# Altium PCB Copy of VCO-PCBNIRMAZZ.PcbDoc
Units mm, origin at the board's own origin, x right, y up, seen from the top; angles counter-clockwise.
Board outline 152.4 x 101.6 mm, 2 copper layers (Top Layer, Bottom Layer), stack 1.59 mm thick; 15 components, 11 nets, 37 pads, 4 vias.
Unrouted connection lines stored in the file: 2.
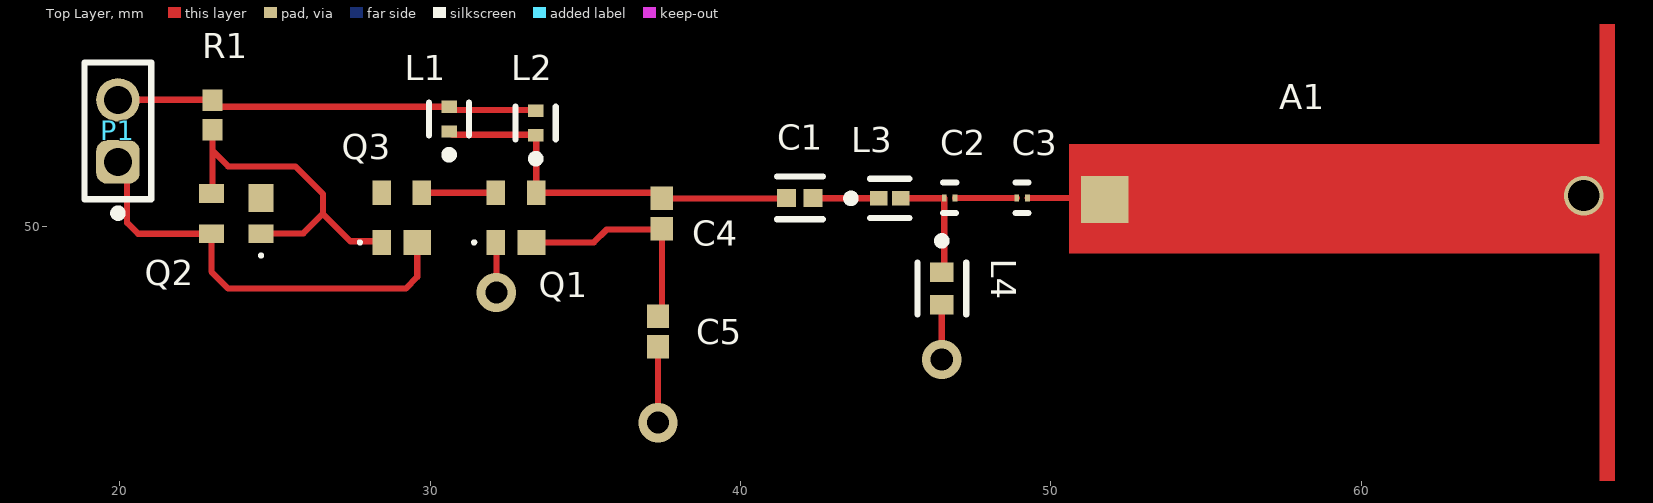
[diagram p0: Top Layer view]
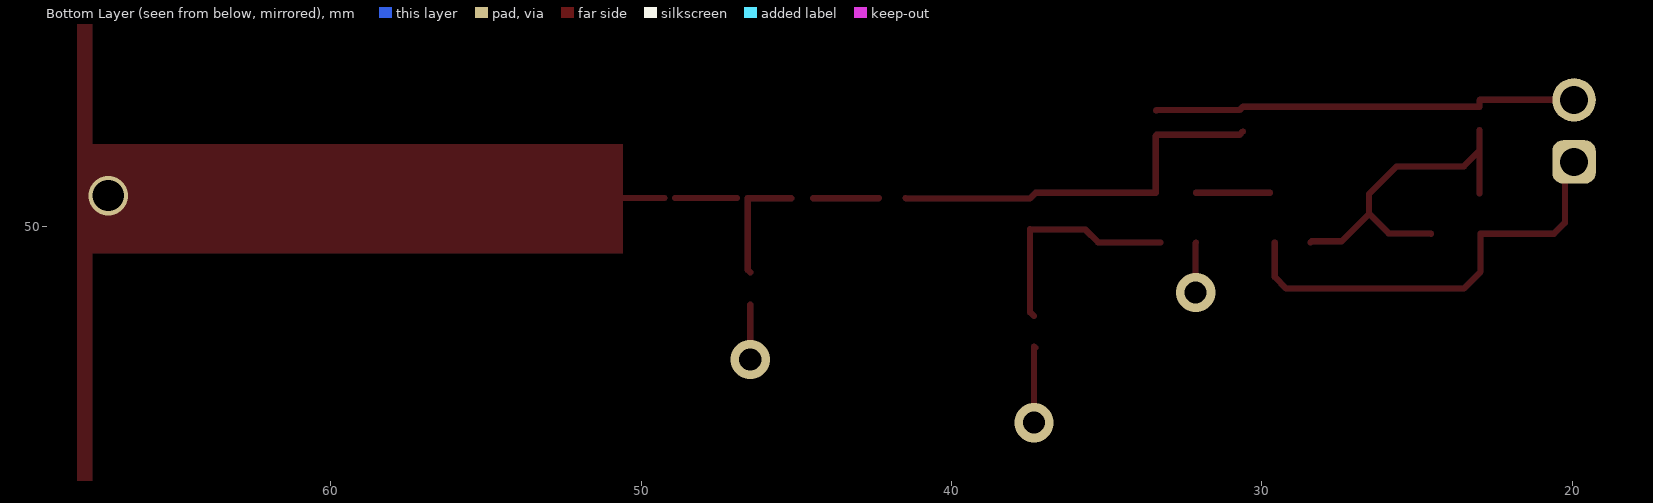
[diagram p1: Bottom Layer view, seen from below]

## Layer stack, top to bottom
Top Solder: solder mask 0.0102, Solder Resist, Dk 3.5
Top Layer: signal copper 0.035
Dielectric 1: dielectric 1.52, RO4350B, Dk 4.8
Bottom Layer: signal copper 0.035
Bottom Solder: solder mask 0.0102, Solder Resist, Dk 3.5

## Board outline
0.762,0.508 153.162,0.508 153.162,102.108 0.762,102.108
cut-out: 13.462,101.854 114.173,101.854 114.554,102.235 114.554,0.762 13.589,0.762 13.462,0.635

## Design rules (kind name [scope] priority, off if disabled: settings)
BoardOutlineClearance [All] p1: gap=0.2 ignorepadtopadclearanceinfootprint=FALSE
Clearance [All] p1: gap=0.127 ignorepadtopadclearanceinfootprint=FALSE except(0.25: Arc-Hole Track-Hole SMDPad-Hole THPad-Hole Via-Hole Fill-Hole Poly-Hole Region-Hole Text-Hole)
ComponentClearance [All] p1: gap=0.127 collisioncheckmode=3 verticalgap=0.127 showdistances=TRUE
DiffPairsRouting [All] p1: maxlimit=0.254 minlimit=0.127 mostfreqgap=0.127 toplayer_minwidth=0.127 toplayer_maxwidth=25.4 toplayer_prefwidth=0.127 bottomlayer_minwidth=0.127 bottomlayer_maxwidth=25.4 bottomlayer_prefwidth=0.127 maxuncoupledlength=12.7
Height [All] p1: minheight=0 maxheight=1816.048 prefheight=12.7
HoleSize [All] p1: absolutevalues=TRUE maxlimit=6.3 minlimit=0.3 maxpercent=80.000 minpercent=20.000
HoleToHoleClearance [All] p1: gap=0.25 allowstackedmicrovias=FALSE
MinimumAnnularRing [All] p1: minimumring=0.076
MinimumSolderMaskSliver [All] p1: minsoldermaskwidth=0
PlaneClearance [All] p1: clearance=0.127
PlaneConnect PlaneConnectPowerPads [InPadClass('PowerPads')] p1: planeconnectstyle=Direct reliefexpansion=0.508 reliefentries=4 reliefconductorwidth=0.254 reliefairgap=0.254
PlaneConnect [All] p2: pad.planeconnectstyle=Relief pad.reliefexpansion=0.3 pad.reliefentries=4 pad.reliefconductorwidth=0.127 pad.reliefairgap=0.127 via.planeconnectstyle=Direct via.reliefexpansion=0.3 via.reliefentries=4 via.reliefconductorwidth=0.127 via.reliefairgap=0.127
PolygonConnect PolygonConnectPowerPads [All vs (InPadClass('PowerPads'))] p1: connectstyle=Direct reliefconductorwidth=0.254 reliefentries=4 polygonreliefangle="90 Angle" airgapwidth=0.254
PolygonConnect [All] p2: thpad.connectstyle=Relief thpad.reliefconductorwidth=0.127 thpad.reliefentries=4 thpad.polygonreliefangle="90 Angle" thpad.airgapwidth=0.127 smdpad.connectstyle=Relief smdpad.reliefconductorwidth=0.127 smdpad.reliefentries=4 smdpad.polygonreliefangle="90 Angle" smdpad.airgapwidth=0.127 via.connectstyle=Direct via.reliefconductorwidth=0.127 via.reliefentries=4 via.polygonreliefangle="90 Angle" via.airgapwidth=0.127
RoutingVias [All] p1: holewidth=0.3 width=0.6 viastyle="Through Hole" minholewidth=0.3 minwidth=0.6 maxholewidth=0.6 maxwidth=6.6
SilkToSilkClearance [All] p1: silktosilkclearance=0
SilkToSolderMaskClearance [IsPad] p1: minsilkscreentomaskgap=0.127 clearancetoexposedcopper=TRUE
SolderMaskExpansion [All] p1: expansion=0.075 istentingtop=FALSE
SupplyNets "Schematic Supply Nets_2" [InNet('GND')] p1: voltage=0.000
SupplyNets "Schematic Supply Nets_1" [InNet('Vcc')] p2: voltage=0.000
SupplyNets "Schematic Supply Nets" [InNet('Vee')] p3: voltage=0.000
Width [All] p1: maxlimit=25.4 minlimit=0.127 preferedwidth=0.127 minimp=50.000000 maximp=50.000000 favimp=50.000000
20 further rules are at their usual default settings.

## Components (designator, comment, footprint, x,y, rotation, side; value= is the part's Value field where it differs from the comment)
A1 "CustomAntenna" CustomAntennaFootprint 80.434,51 r270 top net-tie
C1 "GRM1555C1H102FA01D" FP-GRM155-0_05-IPC_B 41.91,50.927 r0 top
C2 "TMK042CG4R2BD-W" FP-01005-L_0_4_0_02-W_0_2-MFG 46.736,50.927 r0 top
C3 "TMK042CG4R2BD-W" FP-01005-L_0_4_0_02-W_0_2-MFG 49.07,50.927 r0 top
C4 "GRM1555C1H3R4WA01D" CAPC1005X55X25ML05T10 37.465,50.419 r90 top
C5 "GRM1555C1H3R4WA01D" CAPC1005X55X25ML05T10 37.338,46.627 r90 top
L1 "LQG15HN2N0B02D" FP-LQG15HH_02-MFG 30.607,53.467 r90 top
L2 "LQG15HN2N0B02D" FP-LQG15HH_02-MFG 33.401,53.34 r90 top
L3 "LQP03TN2N0B02D" FP-LQP03TG_02-IPC_A 44.804,50.912 r0 top
L4 "LQG15WZ10NG02D" FP-LQG15WH_02-IPC_A 46.482,48.006 r270 top
P1 "62000211121" 62000211121 19.939,53.086 r90 top
Q1 "BFP520" INF-SOT343_V 32.766,50.292 r90 top
Q2 "BFP520" INF-SOT343_V 23.749,50.419 r180 top
Q3 "BFP520" INF-SOT343_V 29.083,50.292 r90 top
R1 "RC0402FR-074K53L" RESC1005X40X25ML05T10 22.987,53.594 r90 top

## Footprints (in the part's own frame and the unit in brackets; to place one, negate y for a bottom-side part, rotate by r counter-clockwise, add the part's x,y. Pads: shape width x height; smd on the part's side, far side on the other; paste and mask are expansions set on the pad)
62000211121 [mm] "Pin Header, pitch 2.00 mm, THT, Vertical, single row, 2p"
  rrect50% 1.4x1.4 hole 0.9: 1(-1,0)
  round 1.4 hole 0.9: 2(1,0)
  silkscreen extent -2.77,-1.07 2.2,1.07, body extent -2,-1 2,1, height 6.05
CAPC1005X55X25ML05T10 [mm] "Chip Capacitor, 2-Leads, Body 1.00x0.50mm, IPC Low Density"
  rect 0.76x0.72 smd: 1(-0.49,0) 2(0.49,0)
  body extent -0.53,-0.28 0.53,0.27, height 0.55
CustomAntennaFootprint [mil]
  round 60 on Top Solder: 0(0,-522.32) 1(5,-1130)
  rect 60x60 smd: 1(5,-1130)
  Top Layer region: 73.53,-1175.32 73.53,-488.77 -65.44,-488.77 -65.44,-1175.32
  Top Layer region: -486.48,-502.65 486.59,-502.65 486.59,-482.96 -486.48,-482.96
  Top Layer region: -513.32,-404.16 513.32,-404.16 513.32,404.28 -513.32,404.28
FP-01005-L_0_4_0_02-W_0_2-MFG [mm]
  rect 0.15x0.225 smd paste+0 mask+0: 1(-0.175,0) 2(0.175,0)
  silkscreen extent -0.21,-0.49 0.21,0.5, body extent -0.35,-0.21 0.35,0.21, height 0.25
FP-GRM155-0_05-IPC_B [mm]
  rect 0.615x0.572 smd paste+0 mask+0: 1(-0.429,0) 2(0.429,0)
  silkscreen extent -0.74,-0.69 0.74,0.69, body extent -0.89,-0.44 0.89,0.44, height 0.25
FP-LQG15HH_02-MFG [mm]
  rect 0.4x0.5 smd paste+0 mask+0: 1(-0.4,0) 2(0.4,0)
  silkscreen extent -1.27,-0.64 0.53,0.65, body extent -0.7,-0.38 0.7,0.38, height 0.25
FP-LQG15WH_02-IPC_A [mm]
  rect 0.627x0.772 smd paste+0 mask+0: 1(-0.523,0) 2(0.523,0)
  silkscreen extent -1.66,-0.79 0.84,0.79, body extent -1.04,-0.59 1.04,0.59, height 0.25
FP-LQP03TG_02-IPC_A [mm]
  rect 0.554x0.463 smd paste+0 mask+0: 1(-0.354,0) 2(0.354,0)
  silkscreen extent -1.37,-0.63 0.63,0.63, body extent -0.83,-0.43 0.83,0.43, height 0.25
INF-SOT343_V [mm] "SOT343, 4-Leads, Body 2x1.25 mm"
  rect 0.8x0.6 smd: 1(-0.8,0.65) 3(0.8,-0.65) 4(0.8,0.65)
  rect 0.8x0.9 smd: 2(-0.8,-0.5)
  silkscreen extent -0.85,1.3 -0.75,1.4, body extent -0.63,-1 0.63,1, height 1
RESC1005X40X25ML05T10 [mm] "Chip Resistor, 2-Leads, Body 1.00x0.50mm, IPC Low Density"
  rect 0.7x0.65 smd: 1(-0.475,0) 2(0.475,0)
  body extent -0.53,-0.27 0.53,0.28, height 0.4

## Part data
A1: "Custom Antenna from CST"
C1: library part CMP-06035-003843-1, "Chip Multilayer Ceramic Capacitors for General Purpose, 0402, 1000pF, C0G, 30ppm/°C, 1%, 50V", Capacitance=1nF, Case Code (Imperial)=0402, Case Code (Metric)=1005, Dielectric=C0G, Max Operating Temperature=125°C, Min Operating Temperature=-55°C, Package Quantity=1, Tolerance=1%, Voltage=50V, Case/Package=0402, Depth=0.5mm, Height=0.5mm, Lead Free="Lead Free", Length=1mm, Material=Ceramic, Mount="Surface Mount", Packaging="Tape and Reel", Radiation Hardening=No, REACH SVHC="No SVHC", Termination=SMD/SMT, Thickness=0.022inch, Voltage Rating=50V, Voltage Rating (DC)=50V, Width=0.02inch
C2 C3: library part CMP-14477-002930-2, "None", RoHS Compliant=Yes
C4 C5: library part CMP-1034-00271-2, Manufacturer=Murata, Part Number=GRM1555C1H3R4WA01D
L1 L2: library part CMP-06042-001124-1, "Multilayer type RF Inductor 2nH ±0.1nH 0.09Ω 900mA 0402"
L3: library part CMP-06042-013297-1, "Film type RF Inductor 2nH ±0.1nH 600mA 0.15Ω 0201 (0603)", Case Code (Imperial)=0201, Case Code (Metric)=0603, Current=400mA, Current Rating=600mA, DC Resistance (DCR)=150mR, Inductance=2nH, Max Operating Temperature=125°C, Min Operating Temperature=-55°C, Package Quantity=15000, Resistor Type="Thin Film", Self Resonant Frequency=12.5GHz, Test Frequency=500MHz, Case/Package=0201, Core Material=Non-Magnetic, DC Current=600mA, Depth=0.33mm, Height=0.3mm, Height - Seated (Max)=0.013inch, Length=0.6mm, Max DC Current=600mA, Military Standard=Not, Mount="Surface Mount", Packaging="Tape and Reel", Q Factor=14, REACH SVHC="No SVHC", Shielding=Unshielded, Termination=SMD/SMT, Width=0.012inch
L4: library part CMP-06042-006093-1, "Multilayer type Inductor for Automotive 10nH ±2% 0.19Ω 500mA 0402"
P1: library part CMP-1502-00956-4, Contact Resistance=20mΩ, Current Rating=2A, Max Operating Temperature=105°C, Min Operating Temperature=-40°C, Operating Supply Voltage=200V, Contact Material=Gold, Gender=Male, Height=6.35mm, Lead Pitch=2mm, NexarPartId=61924778, Number of Contacts=2, Number of Pins=2, Number of Rows=1, Orientation=Vertical, RoHS=Non-Compliant, Voltage Rating=200V
Q1 Q2 Q3: library part CMP-1202-00001-1, "NPN Silicon RF Transistor, 2.5 V VCEO, 40 mA IC, 23.5 dB Gmax, SOT343, Green", Manufacturer=Infineon, ComponentLink1Description="Manufacturer URL", ComponentLink1URL=http://www.infineon.com/, ComponentLink2Description=Datasheet, ComponentLink2URL=http://www.infineon.com/dgdl/bfp520.pdf?folderId=db3a30431400ef68011425b291f205c5&fileId=db3a30431400ef680114275a86cd0745&location=en.Products.RF.RF_Transistors_.Low_Noise_Si_Transistors_up_to_5_GHz_.DATASHEET.bfp520.pdf, ComponentLink3Description="Package Specification", ComponentLink3URL=http://www.infineon.com/dgdl/SOT343-Package_Overview.pdf?folderId=db3a30431936bc4b0119535155343cba&fileId=db3a30431936bc4b0119535a9f393cd3, DatasheetVersion=Aug-2010, Gmax (typ)="23.5 dB", Green=yes, Halogen-free=yes, IC (max)="40 mA", Mounting Technology="Surface Mount", NFmin (typ)="0.95 dB", PackageDescription="4-Pin Small Outline Transistor Package, 1.25 x 2 mm Body", PackageReference=SOT343, PartNumber=BFP520, Ptot (max)="100 mW", VCEO (max)="2.5 V"
R1: library part CMP-2002-07712-1, Manufacturer="Yageo / Phycomp", Part Number=RC0402FR-074K53L

## Via types
v1: diameter 1.27, hole 0.711, Top Layer to Bottom Layer, 3 vias
v2: diameter 1.27, hole 1, Top Layer to Bottom Layer, 1 vias

## Nets (pads, with @x,y where several pads share a name; then routed paths per layer and width w, separated by ;. In a path a pad name is that pad's centre, name@x,y a point inside that pad or via, vN(x,y) a via of type N, cw(c..) or ccw(c..) an arc to the next point about the centre after c; other vN are vias at no path point)
GND: C5.1 L4.2 Q1.1 | length 5.9
  Top Layer w0.2: v1(32.131,47.879) Q1.1@32.131,49.477 ; C5.1@37.302,46.101 C5.1 v1(37.338,43.688) ; v1(46.482,45.72) L4.2 ; Q1.1@32.131,49.477 Q1.1 Q1.1@32.131,49.477
NetA1_1: A1.1@51.732,50.873 C3.2 | length 2.5
  Top Layer w0.2: C3.2 51.678,50.927 A1.1@51.732,50.873
NetC1_1: C1.1 C4.2 L1.1 L2.1 Q1.3 | length 13
  Top Layer w0.2: L2.1 L2.1@33.416,52.925 ; C1.1 41.463,50.909 C4.2 37.282,51.092 Q1.3 L2.1@33.416,52.925 ; L1.1@30.715,52.959 33.382,52.959 L2.1@33.416,52.925 ; L1.1@30.715,52.959 L1.1 L1.1@30.715,52.959
NetC1_2: C1.2 L3.1 | length 2.1
  Top Layer w0.2: C1.2 42.353,50.912 L3.1
NetC2_1: C2.1 L3.2 L4.1 | length 3.8
  Top Layer w0.2: L3.2 46.549,50.912 46.561,50.924 C2.1 46.561,48.608 L4.1
NetC2_2: C2.2 C3.1 | length 2
  Top Layer w0.2: C2.2 C3.1
NetC4_1: C4.1 C5.2 Q1.2 | length 7.2
  Top Layer w0.2: Q1.2 35.268,49.492 35.685,49.909 37.445,49.909 C4.1 37.465,47.244 C5.2
NetQ1_4: Q1.4 Q3.3 | length 2.4
  Top Layer w0.2: Q3.3 Q1.4
NetQ2_1: Q2.1 Q2.3 Q3.1 R1.1 | length 11.4
  Top Layer w0.2: Q2.3@22.987,51.069 22.987,52.451 ; R1.1 22.987,52.451 ; Q2.1 24.564,49.784 25.908,49.784 26.543,50.419 ; Q3.1 28.392,49.532 27.43,49.532 26.543,50.419 ; 22.987,52.451 23.495,51.943 25.654,51.943 26.543,51.054 26.543,50.419
Vcc: L1.2 L2.2 P1.2 R1.2 | length 13.7
  Top Layer w0.2: P1.2 22.97,54.086 R1.2 22.987,53.867 L1.2 30.715,53.759 33.382,53.759 L2.2
Vee: P1.1 Q2.4 Q3.2 | length 14.3
  Top Layer w0.2: P1.1 20.231,51.794 20.231,50.127 20.589,49.769 Q2.4 22.949,48.552 23.495,48.006 29.21,48.006 29.583,48.379 Q3.2
pads on no net: A1.0 A1.1@51.732,50.873 Q2.2 Q3.4
copper on no net:
  other v2: 67.167,51